# Altium PCB NSTTL.PcbDoc
Units mil, origin at the board's own origin, x right, y up, seen from the top; angles counter-clockwise.
Board outline 1393.7 x 1610.24 mil, 2 copper layers (Top Layer, Bottom Layer); 10 components, 9 nets, 45 pads, 7 vias.
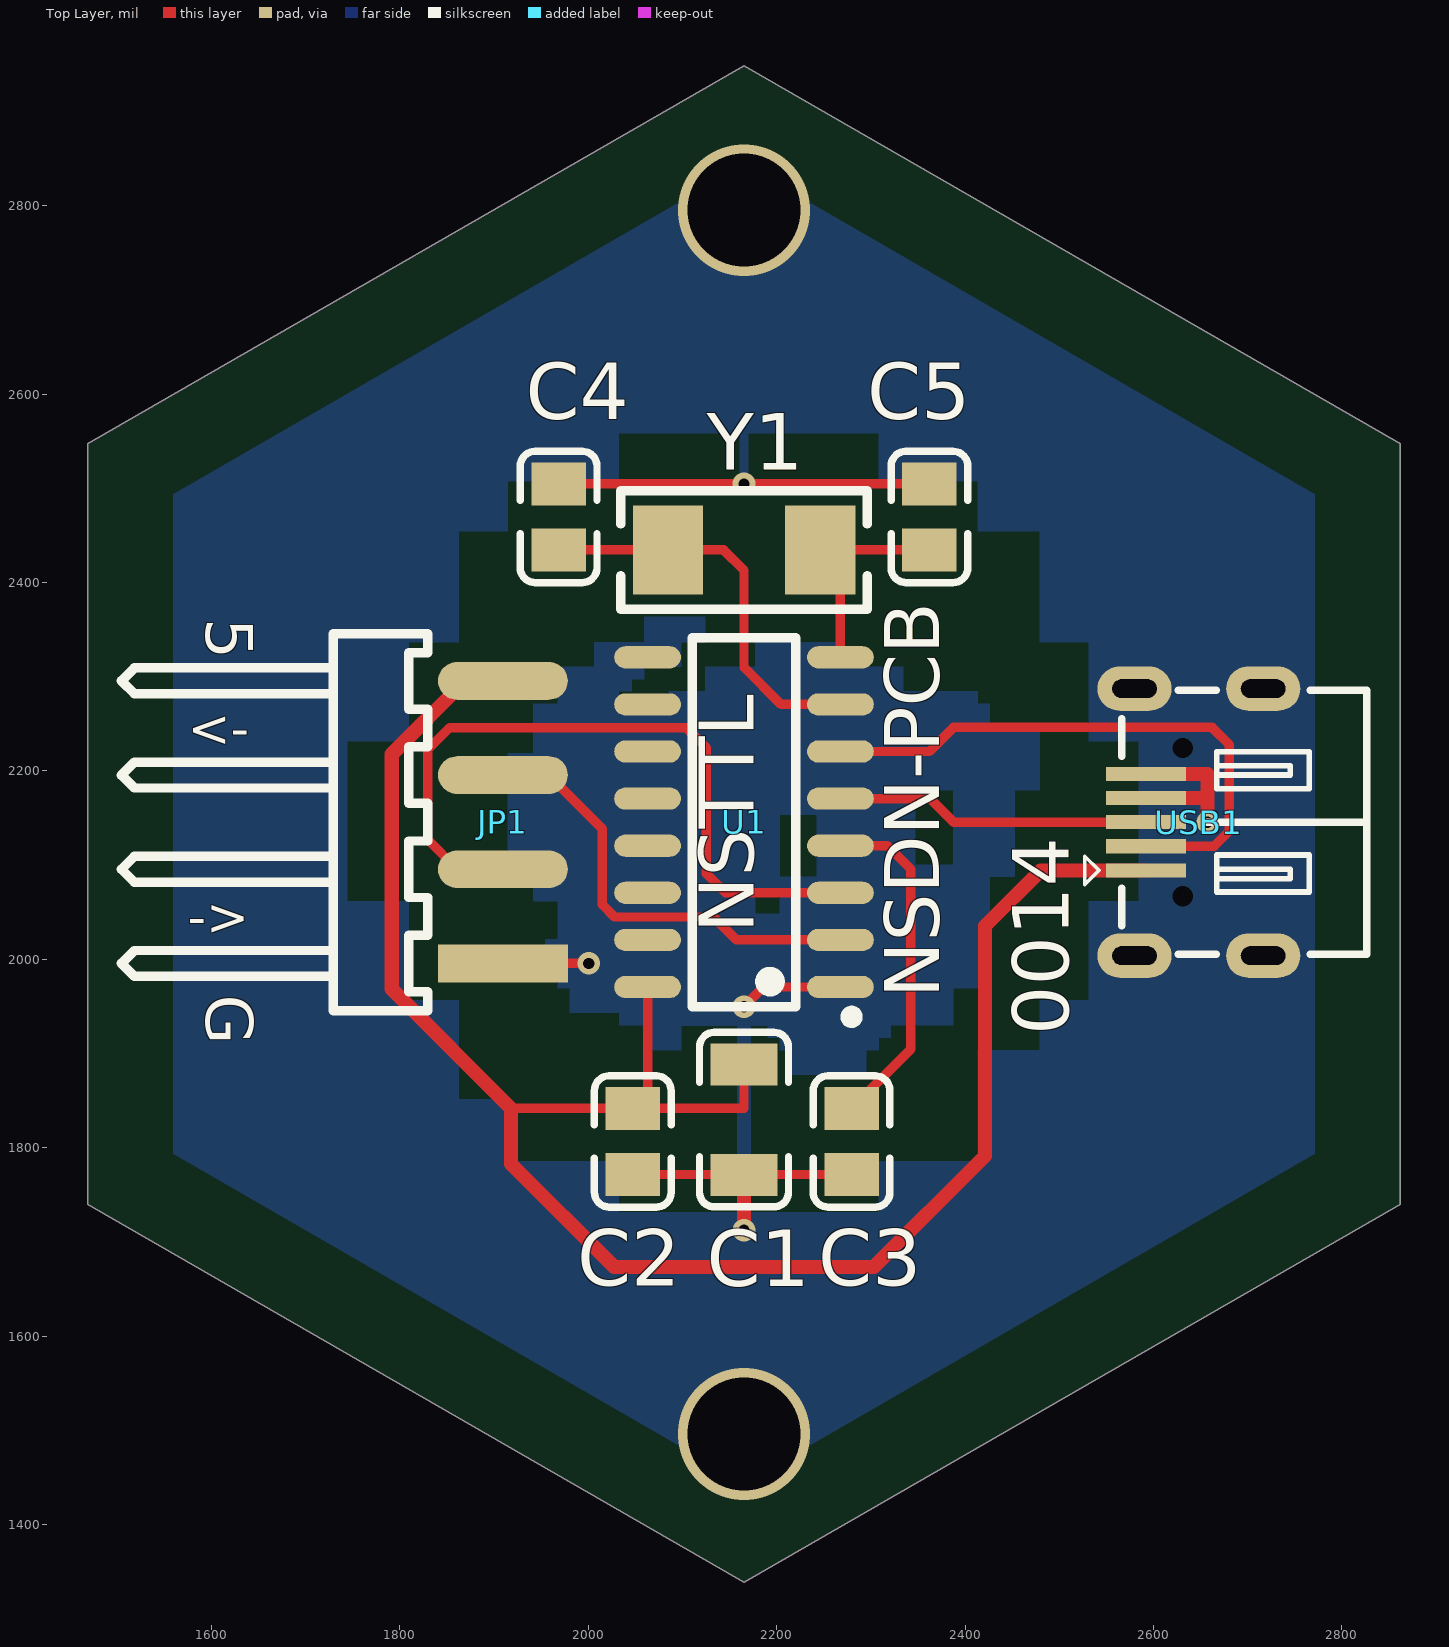
[diagram p0: Top Layer view]
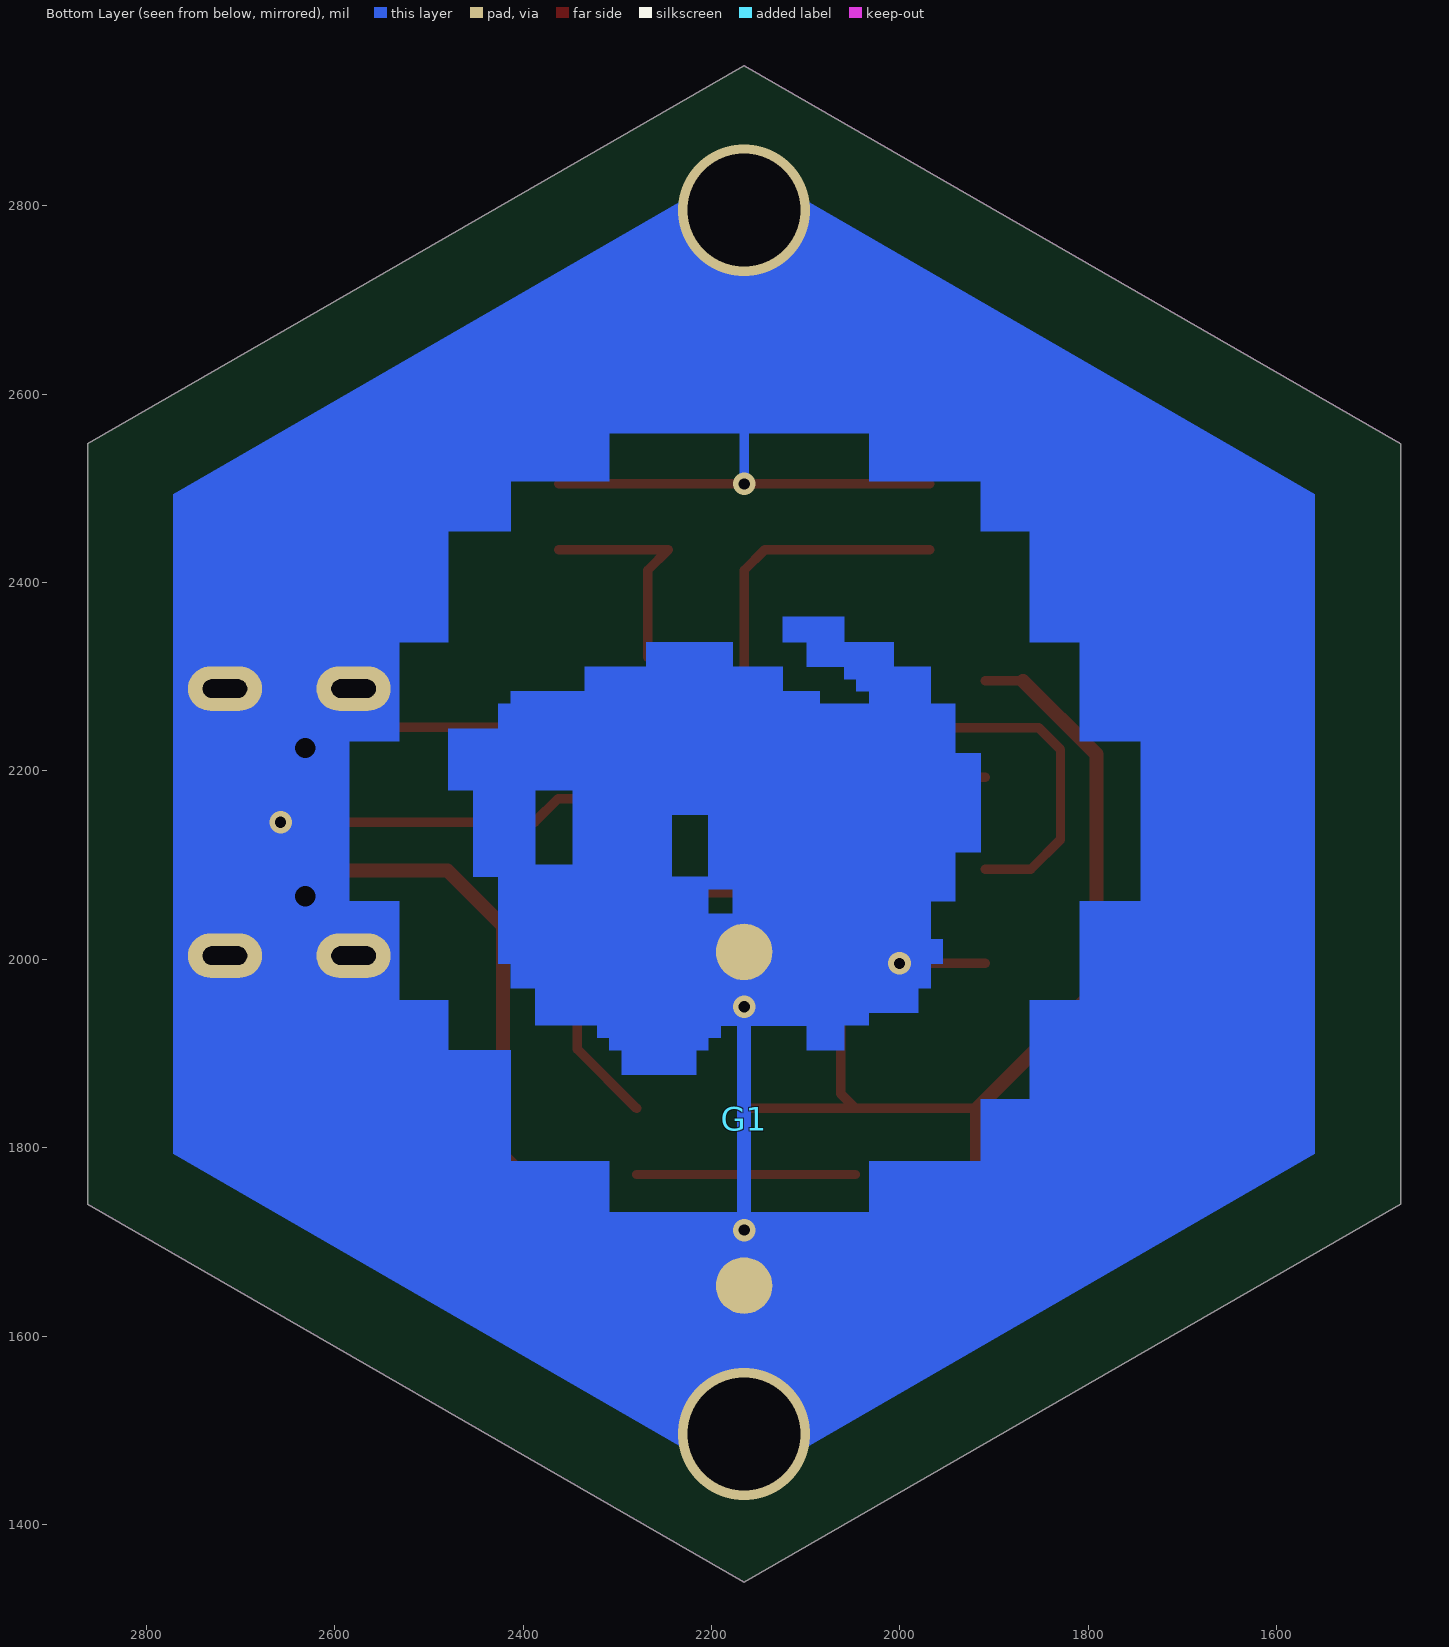
[diagram p1: Bottom Layer view, seen from below]

## Layer stack, top to bottom
Top Solder: solder mask 0.4, Solder Resist, Dk 3.5
Top Layer: signal copper 1.4
Dielectric 1: dielectric 12.6, FR-4, Dk 4.8
Bottom Layer: signal copper 1.4
Bottom Solder: solder mask 0.4, Solder Resist, Dk 3.5

## Board outline
1468.5,1740.16 2165.35,1338.58 2862.2,1740.16 2862.2,2547.24 2165.35,2948.82 1468.5,2547.24

## Design rules (kind name [scope] priority, off if disabled: settings)
Clearance [All] p1: gap=6 ignorepadtopadclearanceinfootprint=FALSE except(0: Arc-Hole Track-Hole SMDPad-Hole THPad-Hole Via-Hole Fill-Hole Poly-Hole Region-Hole Text-Hole)
HoleSize [All] p1: absolutevalues=TRUE maxlimit=250 minlimit=11.81 maxpercent=80.000 minpercent=20.000
HoleToHoleClearance [All] p1: gap=18 allowstackedmicrovias=TRUE
MinimumSolderMaskSliver [All] p1: minsoldermaskwidth=6
PolygonConnect [All] p1: connectstyle=Relief reliefconductorwidth=10 reliefentries=4 polygonreliefangle="90 Angle" airgapwidth=10
RoutingVias [All] p1: holewidth=12 width=24 viastyle="Through Hole" minholewidth=11.81 minwidth=23.62 maxholewidth=250 maxwidth=261.81
SilkToSilkClearance [All] p1: silktosilkclearance=6
SilkToSolderMaskClearance [IsPad] p1: minsilkscreentomaskgap=6 clearancetoexposedcopper=TRUE
SolderMaskExpansion [All] p1: expansion=2
UnRoutedNet [All] p1: checkbadconnections=TRUE
Width [All] p1: maxlimit=20 minlimit=6 preferedwidth=8
24 further rules are at their usual default settings.

## Components (designator, comment, footprint, x,y, rotation, side; value= is the part's Value field where it differs from the comment)
C1 "10uF (106) 10% 50V" 1206_C 2165.35,1829.92 r270 top
C2 "100nF(104) 10% 50V" 0805_C 2047.24,1806.69 r270 top
C3 "100nF(104) 10% 50V" 0805_C 2279.53,1806.69 r270 top
C4 "20pF (200) 5% 50V" 0805_C 1968.5,2469.69 r90 top
C5 "20pF (200) 5% 50V" 0805_C 2362.2,2469.69 r270 top
G1 "NSDN_40mm_B" NSDN_40mm_B 2165.35,1338.58 r180 bottom locked
JP1 "HDR-1X4" HDR2.54-WS-4P 1909.45,2145.67 r90 top
U1 "CH340G" SOIC-16_150mil 2165.35,2145.67 r90 top
USB1 "USB-5P" USB-MICRO_D 2716.54,2145.67 r90 top
Y1 "12MHZ 20PF 20PPM" SMD-5032_2P 2165.35,2434.65 r180 top

## Footprints (in the part's own frame and the unit in brackets; to place one, negate y for a bottom-side part, rotate by r counter-clockwise, add the part's x,y. Pads: shape width x height; smd on the part's side, far side on the other; paste and mask are expansions set on the pad)
0805_C [mm]
  rect 1.16x1.47 smd: 1(-0.89,0) 2(0.89,0)
  silkscreen extent -1.77,-1.04 1.77,1.04, body extent -1,-0.62 1,0.63, height 0.77
1206_C [mm]
  rect 1.13x1.8 smd: 1(-1.49,0) 2(1.49,0)
  silkscreen extent -2.36,-1.2 2.35,1.2, body extent -1.6,-0.81 1.6,0.79, height 1
HDR2.54-WS-4P [mm] "4P卧式贴片排针2.54"
  rect 1.02x3.5 smd: 1(-3.81,0)
  oval 1.02x3.5 smd: 2(-1.27,0) 3(1.27,0) 4(3.81,0)
  silkscreen extent -5.08,2.03 5.08,10.29, body extent -5.08,-0.76 5.08,10.34, height 2.54
NSDN_40mm_B [mil]
  round 60 smd: 1(0,314.96) 2(0,669.29)
  Top Layer region: -104,1047
  Top Layer region: -287.5,841 -287.5,749 -261,749 -261,657 -248,657 -248,631 -222,631 -222,591.5 -156,591.5 -156,578 -143,578 -143,565 -130,565 -130,539 -51,539 -51,565 -38,565 -38,578 -25,578 -25,591 66.5,591 66.5,565 106.5,565 106.5,591.5 132.5,591.5 132.5,605 185,605 185,631 198,631 198,657 211,657 211,683 198,683 198,723 -12,723 -12,710 -38,710 -38,749 -77,749 -77,815 -182,815 -182,762 -222,762 -222,841
  Top Layer region: -314,841 -314,906 -261,906 -261,933 -248,933 -248,946 -169,946 -169,972 -104,972 -104,998 -12,998 -12,972 41,972 41,946 80,946 80,933 133,933 133,946 119,946 119,959 106,959 106,972 66.5,972 66.5,998 41,998 41,1025 106,1025 106,998 159,998 159,972 198,972 198,933 224,933 224,880 251,880 251,775 224,775 224,723 -12,723 -12,736 -38,736 -38,815 -182,815 -182,841
  Top Layer region: 0,105 606,455 606,1155 0,1505 0,1220 133,1220 133,1169 251,1169 251,1116 303,1116 303,998 356,998 356,893 421,893 421,723 356,723 356,618 303,618 303,513 251,513 251,447 133,447 133,393 0,393
  Top Layer region: 0,105 -606,455 -606,1155 0,1505 0,1220 -143,1220 -143,1169 -248,1169 -248,1116 -314,1116 -314,998 -366,998 -366,893 -419,893 -419,723 -366,723 -366,618 -314,618 -314,565 -248,565 -248,447 -143,447 -143,393 0,393
  Top Layer region: -697,403
  Top Layer keep-out region: 0,0
SMD-5032_2P [mm]
  rect 1.9x2.4 smd: 1(-2.05,0) 2(2.05,0)
  silkscreen extent -3.32,-1.6 3.32,1.6
SOIC-16_150mil [mm]
  oval 0.6x1.8 smd: 1(-4.445,-2.6) 2(-3.175,-2.6) 3(-1.905,-2.6) 4(-0.635,-2.6) 5(0.635,-2.6) 6(1.905,-2.6) 7(3.175,-2.6) 8(4.445,-2.6) 9(4.445,2.6) 10(3.175,2.6) 11(1.905,2.6) 12(0.635,2.6) 13(-0.635,2.6) 14(-1.905,2.6) 15(-3.175,2.6) 16(-4.445,2.6)
  silkscreen extent -5.4,-3.05 4.97,1.4
USB-MICRO_D [mm] "micro型USB ，6.7*7.5*2.5mm"
  oval 1.2x2 hole 0.5 slot 1.2 at 90 deg: 0(-3.6,0) 0(-3.6,3.47) 0(3.6,0) 0(3.6,3.47)
  round 0 hole 0.55 unplated: 0(-2,2.17) 0(2,2.17)
  rect 0.381x2.15 smd: 1(-1.3,3.16) 2(-0.65,3.16) 3(0,3.16) 4(0.65,3.16) 5(1.3,3.16)
  silkscreen extent -3.56,-2.79 3.56,4.81, body extent -3.99,-2.75 3.99,3.95, height 2.79

## Part data
C1: library part "1206 10uF (106) 10% 50V", "贴片电容", Package=1206, SuppliersPartNumber=C13585, ComponentLink1Description=供应商, ComponentLink1URL=http://www.szlcsc.com/product/details_14236.html, Supplier=LC
C2 C3: library part "0805 100nF(104) 10% 50V", "贴片电容", Package=0805, SuppliersPartNumber=C49678, ComponentLink1Description=供应商, ComponentLink1URL=http://www.szlcsc.com/product/details_50686.html, Supplier=LC
C4 C5: library part "0805 20pF (200) 5% 50V", "贴片电容", Package=0805, SuppliersPartNumber=C1798, ComponentLink1Description=供应商, ComponentLink1URL=http://www.szlcsc.com/product/details_2150.html, Supplier=LC
JP1: library part "Header 4", "4P接插件"
U1: library part CH340G_[C14267], "USB", Package=SOIC-16_150mil, SuppliersPartNumber=C14267, ComponentLink1Description=供应商, ComponentLink1URL=http://www.szlcsc.com/product/details_14927.html, Supplier=LC
USB1: "微型USB母座", BOM名称=微型US, 学习资源=www.ooocke.
Y1: library part "SMD-5032_2P 11.0592MHZ 20PF 20PPM", "贴片晶振", Package=SMD-5032_2P, SuppliersPartNumber=C52026, ComponentLink1Description=供应商, ComponentLink1URL=http://www.szlcsc.com/product/details_53039.html, Supplier=LC

## Via types
v1: diameter 24, hole 12, Top Layer to Bottom Layer, 4 vias
v2: diameter 140, hole 120, Top Layer to Bottom Layer, 2 vias
v3: diameter 24, hole 12, Top Layer to Bottom Layer, tented both sides, 1 vias

## Nets (pads, with @x,y where several pads share a name; then routed paths per layer and width w, separated by ;. In a path a pad name is that pad's centre, name@x,y a point inside that pad or via, vN(x,y) a via of type N, cw(c..) or ccw(c..) an arc to the next point about the centre after c; other vN are vias at no path point)
GND: C1.2 C2.2 C3.2 C4.2 C5.1 G1.1 G1.2 JP1.1 U1.1 USB1.0 USB1.4 USB1.5 | length 1379.7
  Top Layer w10: JP1.1 v1(2000.39,1995.67) ; C4.2 v3(2165.35,2504.72) C5.1 ; C2.2 C1.2 C3.2 ; v1(2165.35,1949.83) 2186.19,1970.67 U1.1
  Top Layer w15: v1(2165.35,1712.6) C1.2 ; USB1.4 2657.48,2171.26 ; USB1.5 2657.48,2196.85 2657.48,2171.26 ; v1(2657.48,2145.67) 2657.48,2171.26
  Bottom Layer w10: v3(2165.35,2504.72) 2165.35,2578.74
  Bottom Layer w15: v1(2165.35,1712.6) v1(2165.35,1949.83)
  other v2: 2165.35,1496.06 2165.35,2795.28
NetC3_1: C3.1 U1.4 | length 365.2
  Top Layer w10: U1.4 2317.52,2120.67 2342.52,2095.67 2342.52,1904.72 C3.1
NetU1_5: U1.5 USB1.3 | length 334.8
  Top Layer w10: U1.5 2362.8,2170.67 2387.8,2145.67 USB1.3
NetU1_6: U1.6 USB1.2 | length 617.8
  Top Layer w10: U1.6 2362.2,2220.67 2387.77,2246.24 2662.27,2246.24 2680.48,2228.03 2680.48,2136.14 2664.42,2120.08 USB1.2
RXD: JP1.2 U1.3 | length 787.1
  Top Layer w10: JP1.2 1861.02,2095.67 1829.55,2127.14 1829.55,2222.64 1852.91,2246 2103.83,2246 2125.43,2224.41 2125.43,2090.91 2145.67,2070.67 U1.3
TXD: JP1.3 U1.2 | length 477
  Top Layer w10: JP1.3@1909.45,2193.48 1960.06,2193.48 2015,2138.54 2015,2058 2028,2045 2132.91,2045 2157.24,2020.67 U1.2
VCC: C1.1 C2.1 JP1.4 U1.16 USB1.1 | length 2104.3
  Top Layer w10: JP1.4@1869.29,2295.67 JP1.4 ; 1918.11,1841.73 C2.1 ; U1.16 2062.99,1857.48 C2.1 ; C1.1 2165.35,1841.73 C2.1
  Top Layer w15: JP1.4@1869.29,2295.67 1791.34,2217.72 1791.34,1968.5 1918.11,1841.73 1918.11,1782.68 2027.56,1673.23 2303.15,1673.23 2421.26,1791.34 2421.26,2035.43 2480.32,2094.49 USB1.1
XI: C4.1 U1.7 Y1.2 | length 427.4
  Top Layer w10: C4.1 Y1.2 2143.7,2434.65 2165.35,2412.99 2165.35,2310.04 2204.72,2270.67 U1.7
XO: C5.2 U1.8 Y1.1 | length 239.1
  Top Layer w10: U1.8 2267.72,2412.99 Y1.1 C5.2
pads on no net: U1.9 U1.10 U1.11 U1.12 U1.13 U1.14 U1.15

## Keep-outs
Keep-Out Layer:
  the board outline again, w1

## Silkscreen, mask and mechanical layers (free items; w line width, h text height)
Top Overlay:
  text "5" at 1594.49,2362.2 h50 r270
  text "<-" at 1574.8,2225.67 h40
  text "NSTTL" at 2194.88,2027.56 h100 r90
  text "->" at 1574.8,2025.67 h40
  text "G" at 1594.49,1962.2 h50 r270
  text "NSDN-PCB" at 2391.73,1958.66 h100 r90
  text "0014" at 2509.84,1919.29 h60 r90
Drill Drawing:
  text "'.Legend'" at 0,0 h60